# Altium PCB Ground Station PCB1.PcbDoc
Units mm, origin at the board's own origin, x right, y up, seen from the top; angles counter-clockwise.
Board outline 110 x 94.13 mm, 2 copper layers (Top Layer, Bottom Layer), stack 1.57 mm thick; 62 components, 41 nets, 189 pads, 0 vias.
Unrouted connection lines stored in the file: 110.
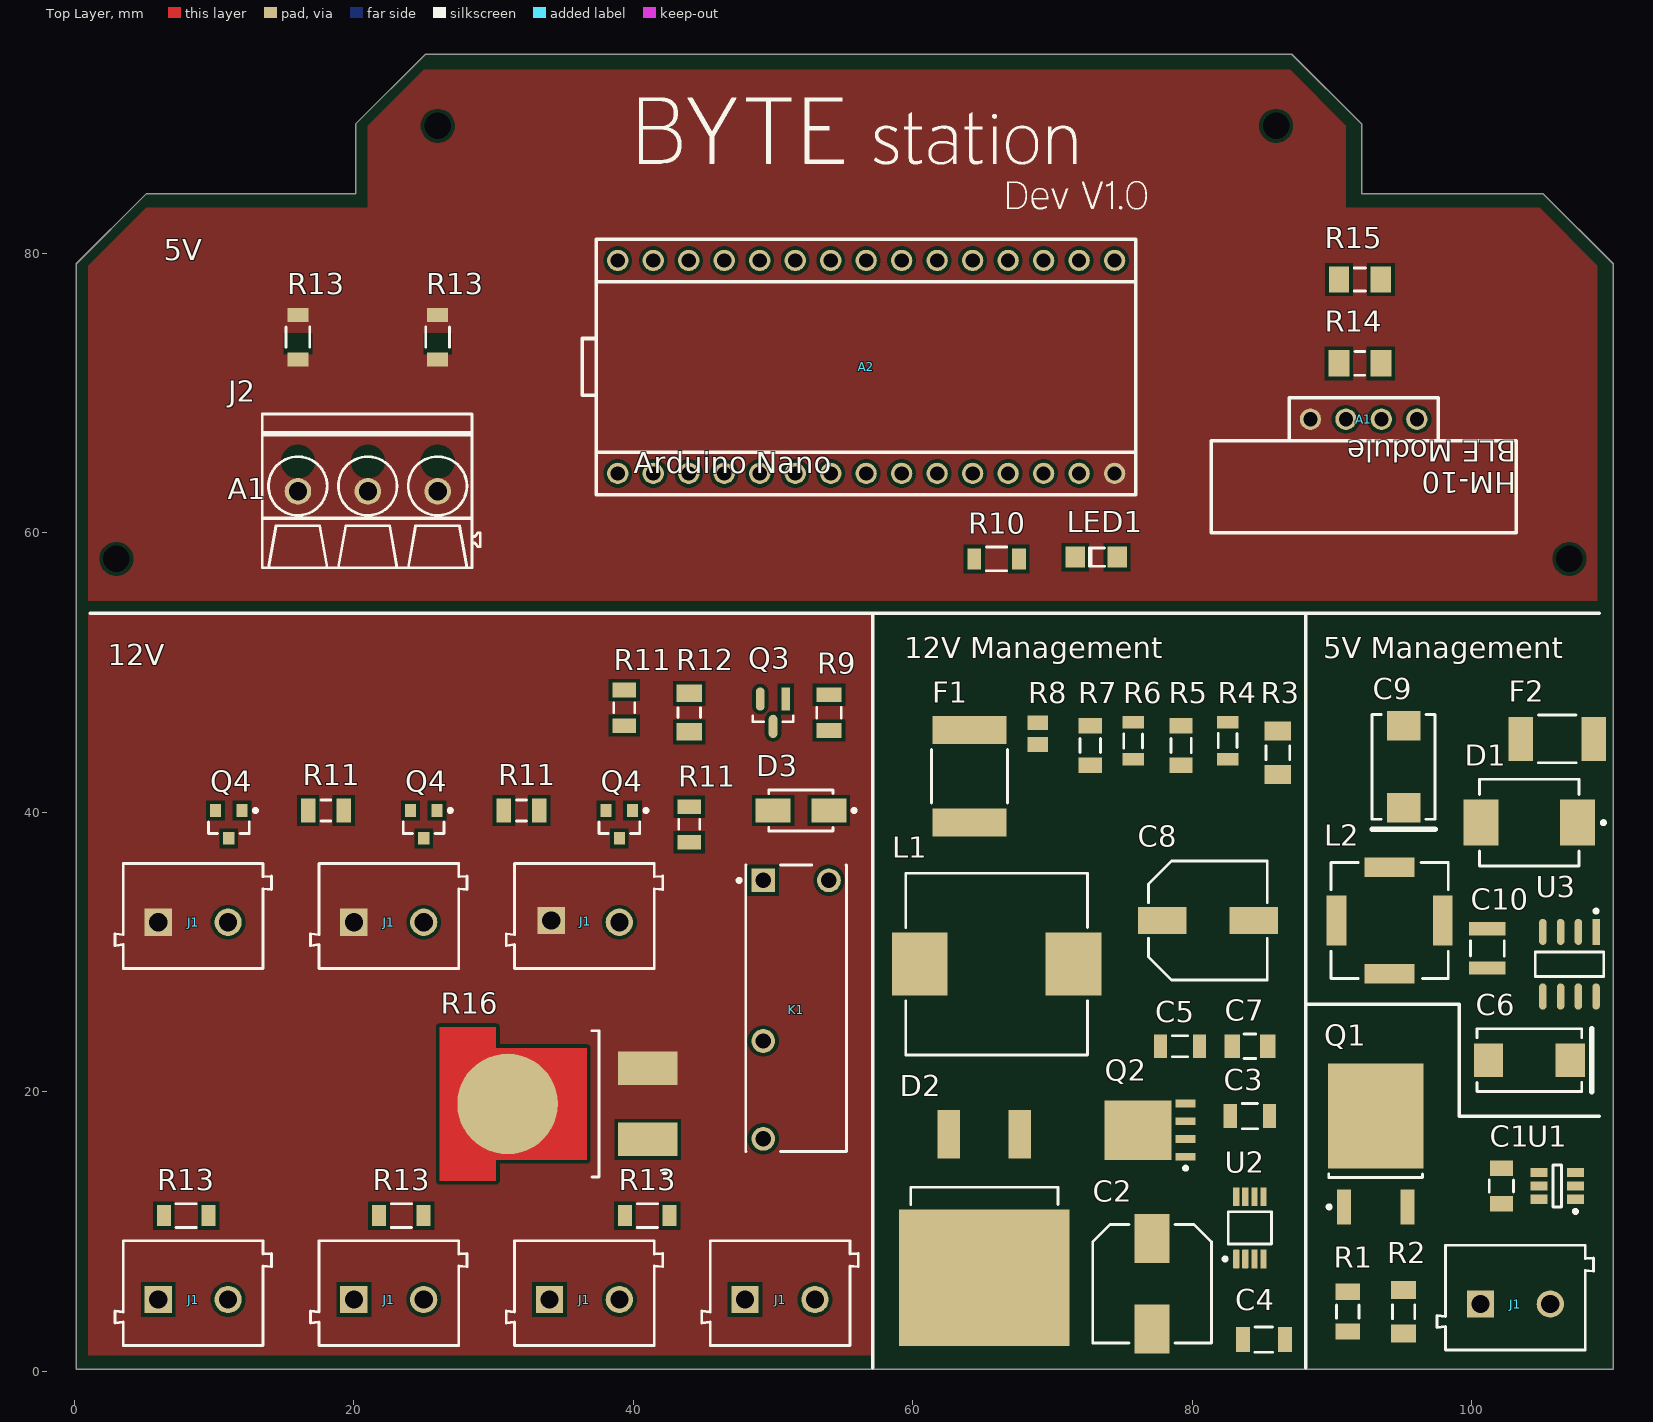
[diagram p0: Top Layer view]
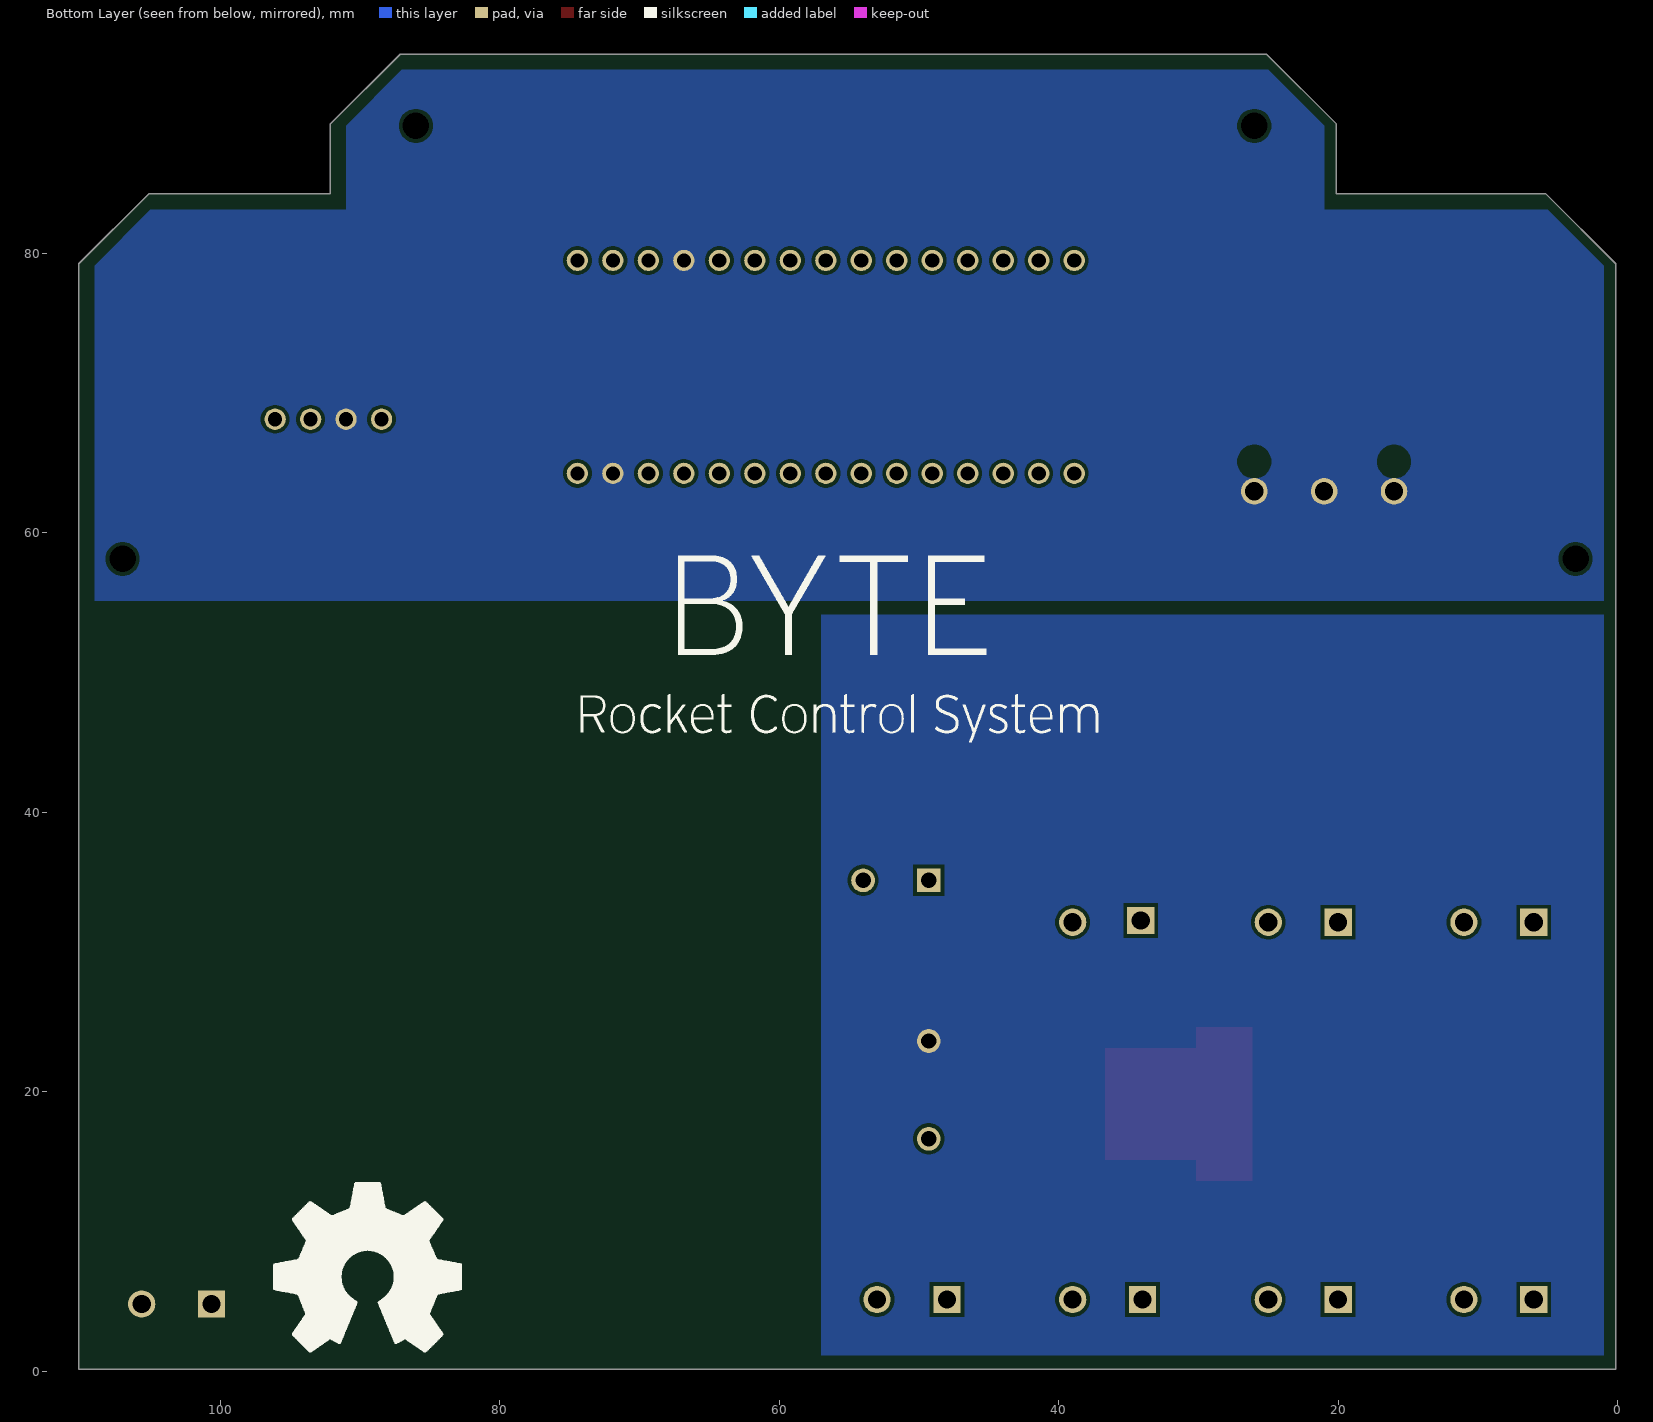
[diagram p1: Bottom Layer view, seen from below]

## Layer stack, top to bottom
Top Solder: solder mask 0.0102, Solder Resist, Dk 3.5
Top Layer: signal copper 0.0356
Dielectric 1: core 1.4986, Core-043, Dk 4.3
Bottom Layer: signal copper 0.0356
Bottom Solder: solder mask 0.0102, Solder Resist, Dk 3.5

## Board outline
0.127,0.127 0.127,79.254 5.127,84.254 20.127,84.254 20.127,89.254 25.127,94.254 87.127,94.254 92.127,89.254 92.127,84.254 105.127,84.254 110.127,79.254 110.127,0.127

## Design rules (kind name [scope] priority, off if disabled: settings)
BoardOutlineClearance [All] p1: gap=0.254 ignorepadtopadclearanceinfootprint=FALSE except(0: Arc-SplitContinuation Track-SplitContinuation SMDPad-SplitContinuation THPad-SplitContinuation Via-SplitContinuation Fill-SplitContinuation Poly-SplitContinuation Region-SplitContinuation Text-SplitContinuation)
Clearance [All] p1: gap=0.254 ignorepadtopadclearanceinfootprint=FALSE except(0: Arc-Hole Track-Hole SMDPad-Hole THPad-Hole Via-Hole Fill-Hole Poly-Hole Region-Hole Text-Hole; 0.127: Arc-Arc Arc-Track Track-Track SMDPad-SMDPad; 0.2: Arc-SMDPad Track-SMDPad; 0.33: Arc-THPad Track-THPad; 0.5: THPad-THPad)
HoleSize [All] p1: absolutevalues=TRUE maxlimit=6.3 minlimit=0.2 maxpercent=80.000 minpercent=20.000
HoleToHoleClearance [All] p1: gap=0.5 allowstackedmicrovias=TRUE
MinimumAnnularRing [All] p1: minimumring=0.13
PlaneConnect [All] p1: planeconnectstyle=Direct reliefexpansion=0.508 reliefentries=4 reliefconductorwidth=0.254 reliefairgap=0.254
PolygonConnect [All] p1: connectstyle=Direct reliefconductorwidth=0.254 reliefentries=4 polygonreliefangle="90 Angle" airgapwidth=0.254
RoomDefinition "Station sheet1" [InComponentClass('Station sheet1')] p1: confinementstyle=ConfineIn formatcopy=TRUE lockcomponents=FALSE outline 111,8 338,8 338,68 111,68
RoomDefinition Power [InComponentClass('Power')] p2: confinementstyle=ConfineIn formatcopy=TRUE lockcomponents=FALSE outline 112,74.55 338,74.55 338,139.55 112,139.55
RoutingPriority RoutingPriority_1 [All] p1: routingpriority=0
RoutingPriority [All] p2: routingpriority=0
RoutingVias [All] p1: holewidth=0.711 width=1.27 viastyle="Through Hole" minholewidth=0.2 minwidth=0.4 maxholewidth=0.711 maxwidth=1.27
SolderMaskExpansion [All] p1: expansion=0.102 istentingtop=FALSE
UnRoutedNet [All] p1: checkbadconnections=TRUE
Width [All] p1: maxlimit=2 minlimit=0.127 preferedwidth=0.254
25 further rules are at their usual default settings.

## Classes and differential pairs
component class "Station sheet1": A1 A2 D3 J1 J2 K1 LED1 Q3 Q4 R9 R10 R11 R12 R13 R14 R15 R16
component class Power: C1 C2 C3 C4 C5 C6 C7 C8 C9 C10 D1 D2 F1 F2 J1 L1 L2 Q1 Q2 R1 R2 R3 R4 R5 R6 R7 R8 U1 U2 U3

## Components (designator, comment, footprint, x,y, rotation, side; value= is the part's Value field where it differs from the comment)
A1 "HM10 SCHEMATIC" HM10 96.08,68.127 r180 top
A2 "ARDUINO NANO" "ARDUINO NANO" 38.887,64.254 r0 top
C1 "CL31B104KBCNFNC" FP-CL31-IPC_C 102.127,13.254 r90 top
C2 "UUD1E221MNL1GS" NIC-CAPA2-8X10_V 77.127,6.254 r270 top
C3 "C1206C104K4RACTU" FP-C1206C-EB-MFG 84.127,18.254 r0 top value="0.10 μF"
C4 "CC1206KRX7R9BB152" FP-CC1206-1_25-MFG 85.127,2.254 r0 top value="1.5 nF"
C5 "CAP 33nF 100V 1206(3216)" CAPC1206(3216)130_L 79.127,23.254 r0 top value=33nF
C6 "TAJE157K020RNJ" AVX-7343-43_L 104.127,22.254 r180 top
C7 "CL31C100DBCNNNC" FP-CL31-IPC_C 84.127,23.254 r0 top
C8 "16SVP180M" PNSC-SVP-E12_L 81.127,32.254 r0 top
C9 "TPSD107K010R0100" AVX-7343-31_L 95.127,43.254 r90 top
C10 "CAP 10nF 50V 1210(3225)" CAPC1210(3225)100_L 101.127,30.254 r270 top value=10nF
D1 "SK33-TP" FP-SMC-MFG 104.127,39.254 r180 top
D2 "STPS20M100SG-TR" FP-STPS20M100SG-TR-MFG 65.127,10.254 r180 top
D3 "S1B-13-F" FP-SMA-MFG 52,40.127 r180 top
F1 "2920L300/15DR" FP-2920L-MFG 64.063,42.576 r270 top value=0.015-0.048Ω
F2 "1812L035/60MR" FP-1812L035-60MR-MFG 106.127,45.254 r0 top value=0.4-1.7Ω
J1 "691102710002" 691102710002#1 103.127,5.254 r0 top
J1 "691102710002" 691102710002#1 50.5,5.577 r0 top
J1 "691102710002" 691102710002#1 8.5,5.577 r0 top
J1 "691102710002" 691102710002#1 36.5,5.577 r0 top
J1 "691102710002" 691102710002#1 22.5,32.577 r0 top
J1 "691102710002" 691102710002#1 8.5,32.577 r0 top
J1 "691102710002" 691102710002#1 22.5,5.577 r0 top
J1 "691102710002" 691102710002#2 36.5,32.577 r0 top
J2 "1934280000" LL_5_00_90_03 21,63 r0 top
K1 "G5NB-1A-E-DC5" FP-G5NB-1A-E-DC5-MFG 51.65,25.977 r270 top
L1 "SRP1250-4R7M" FP-SRP1250-MFG 66,29.127 r180 top
L2 "744071330" "WE-TPC 8043" 94.127,32.254 r180 top
LED1 "150120GS75000" 1206_A 73.127,58.254 r0 top
Q1 "FQD16N25CTM SCHEMATIC" FQD16N25CTM 93.127,16.254 r90 top
Q2 "RJK0651DPB-00#J5" RENE-LFPAK-5_L 76.977,17.254 r180 top
Q3 "MMBT2222A-7-F" FP-SOT23-IPC_A 50,47.127 r270 top
Q4 "BSS138LT1G" ONSC-SOT-23-3-318-08_V 11.05,39.127 r270 top
Q4 "BSS138LT1G" ONSC-SOT-23-3-318-08_V 39,39.127 r270 top
Q4 "BSS138LT1G" ONSC-SOT-23-3-318-08_V 25,39.127 r270 top
R1 "CRCW1206150KFKEB" FP-CRCW1206-e3-IPC_B 91.127,4.254 r270 top
R2 "CRCW1206100RFKEB" RESC3216X60X45ML10T20 95.127,4.254 r270 top
R3 "27K 1% 1206(3216)" RESC1206(3216)_M 86.127,44.254 r90 top value="27000.00 Ohm"
R4 "ERJ-8ENF2551V" RESC3216X70X50LL05T20 82.534,45.127 r90 top
R5 "ERJ-P08J102V" RESC3216X70X50NL05T20 79.206,44.777 r90 top
R6 "ERJ-8ENF8451V" RESC3216X70X50LL05T20 75.775,45.104 r90 top
R7 "ERJ-8ENF1000V" RESC3216X70X50NL05T20 72.702,44.777 r90 top
R8 "WSLP0805R0100FEA" RESC2013X58X38LL25T25 68.939,45.627 r90 top
R9 "CRCW12061K20JNEA" FP-CRCW1206-e3-MFG 54,47.127 r270 top
R10 "AC1206FR-07150RL" FP-AC1206-MFG 66,58.127 r0 top value=150Ω
R11 "CRCW120620K0FKEAHP" RESC3116X65X50LL20T20 18,40.127 r180 top
R11 "CRCW120620K0FKEAHP" RESC3116X65X50LL20T20 32,40.127 r0 top
R11 "CRCW120620K0FKEAHP" RESC3116X65X50LL20T20 39.352,47.477 r90 top
R11 "CRCW120620K0FKEAHP" RESC3116X65X50LL20T20 44,39.127 r270 top
R12 "CRCW120610K0FKEAHP" RESC3116X65X50NL20T20 44,47.127 r270 top
R13 "AC1206FR-074K7L" FP-AC1206-MFG 26,74 r90 top value=4.7KΩ
R13 "AC1206FR-074K7L" FP-AC1206-MFG 41,11.127 r0 top value=4.7KΩ
R13 "AC1206FR-074K7L" FP-AC1206-MFG 16,74 r90 top value=4.7KΩ
R13 "AC1206FR-074K7L" FP-AC1206-MFG 23.4,11.127 r0 top value=4.7KΩ
R13 "AC1206FR-074K7L" FP-AC1206-MFG 8,11.127 r0 top value=4.7KΩ
R14 "ERA8AEB202V" RESC3216X70X50ML20T25 92,72.127 r180 top
R15 "TNPW12061K00BEEN" RESC3216X65X50ML15T25 92,78.127 r180 top
R16 "PWR263S-20-4R70J" FP-PWR263S-20-MFG 34.647,19.127 r90 top value=4.7Ω
U1 "S-1011A70-M6T1U4" S-1011A70-M6T1U4 106.127,13.254 r180 top
U2 "LM3478QMMX/NOPB" DGK0008A_N 84.127,10.254 r90 top
U3 "LM2671MX-5.0/NOPB" FP-D0008A-IPC_C 107,29.127 r270 top

## Footprints (in the part's own frame and the unit in brackets; to place one, negate y for a bottom-side part, rotate by r counter-clockwise, add the part's x,y. Pads: shape width x height; smd on the part's side, far side on the other; paste and mask are expansions set on the pad)
1206_A [mm] "Chip LED, 2-Leads, Body 3.2x1.6mm, IPC Medium Density"
  rect 1.4x1.5 smd: 1(-1.5,0) 2(1.5,0)
  silkscreen extent -0.5,-0.66 0.6,0.65, body extent -1.6,-0.8 1.6,0.8, height 0.68
691102710002#1 [mm] "5,00mm - modular - blue - Horizontal entry with pressure clamp - 9,9 mm height - 02p"
  rect 1.95x1.95 hole 1.3: 1(-2.5,-0.45)
  round 1.95 hole 1.3: 2(2.5,-0.45)
  silkscreen extent -5.6,-3.75 5.6,3.75, body extent -5.6,-3.75 5.6,3.75, height 9.96
691102710002#2 [mm] "5,00mm - modular - blue - Horizontal entry with pressure clamp - 9,9 mm height - 02p"
  rect 1.95x1.95 hole 1.3: 1(-2.373,-0.323)
  round 1.95 hole 1.3: 2(2.5,-0.45)
  silkscreen extent -5.6,-3.75 5.6,3.75, body extent -5.6,-3.75 5.6,3.75, height 9.96
"ARDUINO NANO" [mil]
  round 60 hole 40: 1(1400,600) 2(1300,600) 3(1200,600) 4(1100,600) 5(1000,600) 6(900,600) 7(800,600) 8(700,600) 9(600,600) 10(500,600) 11(400,600) 12(300,600) 13(200,600) 14(100,600) 15(0,600) 16(0,0) 17(100,0) 18(200,0) 19(300,0) 20(400,0) 21(500,0) 22(600,0) 23(700,0) 24(800,0) 25(900,0) 26(1000,0) 27(1100,0) 28(1200,0) 29(1300,0) 30(1400,0)
  silkscreen extent -100,-60 1460,660
AVX-7343-31_L [mm] "Molded Capacitor, 2-Leads, Body 7.5x4.5mm, IPC High Density"
  rect 2.1x2.4 smd: 1(-2.925,0) 2(2.925,0)
  silkscreen extent -4.47,-2.25 3.75,2.25, body extent -3.97,-2.25 3.97,2.25, height 3.1
AVX-7343-43_L [mm] "Molded Capacitor, 2-Leads, Body 7.5x4.5mm, IPC High Density"
  rect 2.1x2.4 smd: 1(-2.925,0) 2(2.925,0)
  silkscreen extent -4.47,-2.25 3.75,2.25, body extent -3.97,-2.25 3.97,2.25, height 4.3
CAPC1206(3216)130_L [mm] "Chip Capacitor, Body 3.2x1.6mm, Height 1.3mm, IPC High Density"
  rect 0.95x1.7 smd: 1(-1.4,0) 2(1.4,0)
  silkscreen extent -0.55,-0.75 0.55,0.75, body extent -1.7,-0.9 1.7,0.9, height 1.3
CAPC1210(3225)100_L [mm] "Chip Capacitor, Body 3.2x2.5mm, Height 1mm, IPC High Density"
  rect 0.95x2.6 smd: 1(-1.4,0) 2(1.4,0)
  silkscreen extent -0.55,-1.2 0.55,1.2, body extent -1.7,-1.35 1.7,1.35, height 1
DGK0008A_N [mm] "TSOP, 8-Leads, Body 3.1x3.1mm, Pitch 0.65mm, IPC Medium Density"
  rrect22% 1.35x0.45 smd: 1(-2.225,0.975) 2(-2.225,0.325) 3(-2.225,-0.325) 4(-2.225,-0.975) 5(2.225,-0.975) 6(2.225,-0.325) 7(2.225,0.325) 8(2.225,0.975)
  silkscreen extent -2.35,-1.55 1.15,1.9, body extent -2.45,-1.5 2.45,1.5, height 0.94
FP-1812L035-60MR-MFG [mm]
  rect 1.78x3.15 smd paste+0 mask+0: 1(-2.615,0) 2(2.615,0)
  silkscreen extent -1.35,-1.71 1.35,1.71, body extent -3.6,-1.81 3.6,1.81, height 0.25
FP-2920L-MFG [mm]
  rect 2x5.3 smd paste+0 mask+0: 1(-3.3,0) 2(3.3,0)
  silkscreen extent -1.92,-2.72 1.92,2.72, body extent -4.4,-2.82 4.4,2.82, height 0.25
FP-AC1206-MFG [mm]
  rect 1x1.5 smd paste+0 mask+0: 1(-1.6,0) 2(1.6,0)
  silkscreen extent -0.72,-0.85 0.72,0.85, body extent -2.2,-0.95 2.2,0.95, height 0.25
FP-C1206C-EB-MFG [mm]
  rect 0.95x1.7 smd paste+0 mask+0: 1(-1.4,0) 2(1.4,0)
  silkscreen extent -0.55,-0.9 0.55,0.9, body extent -2,-1 2,1, height 0.25
FP-CC1206-1_25-MFG [mm]
  rect 1x1.8 smd paste+0 mask+0: 1(-1.5,0) 2(1.5,0)
  silkscreen extent -0.63,-0.9 0.63,0.9, body extent -2.2,-1.25 2.2,1.25, height 0.25
FP-CL31-IPC_C [mm]
  rect 1.105x1.658 smd paste+0 mask+0: 1(-1.276,0) 2(1.276,0)
  silkscreen extent -0.42,-0.87 0.42,0.87, body extent -1.93,-0.97 1.93,0.97, height 0.25
FP-CRCW1206-e3-IPC_B [mm]
  rect 1.156x1.758 smd paste+0 mask+0: 1(-1.426,0) 2(1.426,0)
  silkscreen extent -0.47,-0.8 0.47,0.8, body extent -2.25,-1.13 2.25,1.13, height 0.25
FP-CRCW1206-e3-MFG [mm]
  rect 1.05x1.8 smd paste+0 mask+0: 1(-1.275,0) 2(1.275,0)
  silkscreen extent -0.38,-0.87 0.38,0.87, body extent -1.9,-1 1.9,1, height 0.25
FP-D0008A-IPC_C [mm]
  rect 1.869x0.542 smd paste+0 mask+0: 1(-2.314,1.905)
  rrect100% 1.869x0.542 smd paste+0 mask+0: 2(-2.314,0.635) 3(-2.314,-0.635) 4(-2.314,-1.905) 5(2.314,-1.905) 6(2.314,-0.635) 7(2.314,0.635) 8(2.314,1.905)
  silkscreen extent -3.92,-2.45 0.88,2.45, body extent -3.35,-2.55 3.35,2.55, height 0.25
FP-G5NB-1A-E-DC5-MFG [mm]
  rect 1.7x1.7 hole 1.1 paste-1000 mask+0: 1(-9.15,-2.35)
  round 1.7 hole 1.1 paste-1000 mask+0: 2(2.35,-2.35) 3(9.35,-2.35) 4(-9.15,2.35)
  silkscreen extent -10.25,-4.2 10.25,3.6, body extent -10.35,-3.7 10.35,3.7, height 0.25
FP-PWR263S-20-MFG [mm]
  rect 2.4x4.23 smd paste+0 mask+0: 1(-2.54,-6.385) 2(2.54,-6.385)
  round 7.2 smd paste+0 mask+0: 3(0,3.647)
  Top Layer region: -5.5,8.5 5.5,8.5 5.5,4.48 4,4.48 4,-2.02 -4,-2.02 -4,4.48 -5.5,4.48 -5.5,8.5
  silkscreen extent -5.24,-7.73 5.24,-2.4, body extent -5.6,-8.6 5.6,8.6, height 0.25
FP-SMA-MFG [mm]
  rect 2.5x1.7 smd paste+0 mask+0: 1(-2,0) 2(2,0)
  silkscreen extent -3.93,-1.46 2.3,1.46, body extent -3.35,-1.56 3.35,1.56, height 0.25
FP-SMC-MFG [mm]
  rect 2.5x3.3 smd paste+0 mask+0: 1(-3.45,0) 2(3.45,0)
  silkscreen extent -5.43,-3.11 3.55,3.11, body extent -4.8,-3.21 4.8,3.21, height 0.25
FP-SOT23-IPC_A [mm]
  rect 1.659x0.627 smd paste+0 mask+0: 1(-0.977,0.915)
  rrect100% 1.659x0.627 smd paste+0 mask+0: 2(-0.977,-0.915) 3(0.977,0)
  silkscreen extent 0.23,-1.45 0.65,1.45, body extent -2.31,-1.95 2.31,1.95, height 0.25
FP-SRP1250-MFG [mm]
  rect 4x4.5 smd paste+0 mask+0: 1(-5.5,0) 2(5.5,0)
  silkscreen extent -6.5,-6.5 6.5,6.5, body extent -7.6,-6.75 7.6,6.75, height 0.25
FP-STPS20M100SG-TR-MFG [mm]
  rect 1.6x3.5 smd paste+0 mask+0: 1(-2.54,-6.7) 3(2.54,-6.7)
  rect 12.2x9.75 smd paste+0 mask+0: 4(0,3.575)
  silkscreen extent -5.28,-2.91 5.28,-1.68, body extent -6.2,-8.55 6.2,8.55, height 0.25
FQD16N25CTM [mm] "D-PAK, 3-Pads, Body 6.21x6.72mm (max), IPC Low Density"
  rect 2.5x1 smd: 1(-4.5,2.28) 2(-4.5,-2.28)
  rect 7.5x6.85 smd: 3(2,0)
  silkscreen extent -4.62,-3.35 -2.15,3.45, body extent -2.4,-3.35 3.82,3.35, height 2.39
HM10 [mil]
  round 60 hole 40: 1(0,0) 2(100,0) 3(200,0) 4(300,0)
  silkscreen extent -280,-60 580,320
LL_5_00_90_03 [mm] "OMNIMATE Signal - Serie LL  LL 5.00/03/90 3.2"
  round 1.9 hole 1.3: A1(-5,-0.03) A2(0,-0.03) A3(5,-0.03)
  silkscreen extent -7.55,-5.5 8.05,5.5, body extent -7.55,-5.5 8.05,5.5, height 17.11
NIC-CAPA2-8X10_V [mm] "Aluminum Electrolytic Capacitor, Diameter 8mm, Height 10.8mm, Pitch 6.5mm"
  rect 3.5x2.5 smd: 1(-3.25,0) 2(3.25,0)
  silkscreen extent -4.25,-4.25 4.25,4.25, body extent -3.99,-3.97 3.99,4, height 10.8
ONSC-SOT-23-3-318-08_V [mm] "SOT23, 3-Leads, Body 2.92x1.3mm, Pitch 0.95mm"
  rect 0.9x0.8 smd: 1(-1,0.95) 2(-1,-0.95) 3(1,0)
  silkscreen extent -1.12,-1.46 0.65,2.03, body extent -0.65,-1.46 0.65,1.46, height 1.11
PNSC-SVP-E12_L [mm] "Aluminum Electrolytic Capacitor, Body 8.30x8.30x12.00mm, IPC High Density"
  rect 3.45x1.95 smd: 1(-3.275,0) 2(3.275,0)
  silkscreen extent -4.25,-4.25 4.25,4.25, body extent -4.5,-4.25 4.5,4.25, height 12
RENE-LFPAK-5_L [mm] "DPAK, 5-Leads, Body 5.3x3.95mm, Pitch 1.27mm, IPC High Density"
  rect 1.45x0.55 smd: 1(-2.55,1.905) 2(-2.55,0.635) 3(-2.55,-0.635) 4(-2.55,-1.905)
  rect 4.8x4.25 smd: 5(0.85,0)
  silkscreen extent -2.68,2.61 -2.43,2.85, body extent -2.5,-2.65 3.5,2.65, height 1.13
RESC1206(3216)_M [mm] "Chip Resistor, Body 3.2x1.6mm, IPC Low Density"
  rect 1.35x1.9 smd: 1(-1.55,0) 2(1.55,0)
  silkscreen extent -0.5,-0.85 0.5,0.85, body extent -1.67,-0.87 1.67,0.87, height 0.75
RESC2013X58X38LL25T25 [mm] "Chip Resistor, 2-Leads, Body 2.03x1.27mm, IPC High Density"
  rect 1.05x1.45 smd: 1(-0.775,0) 2(0.775,0)
  body extent -1.14,-0.76 1.14,0.76, height 0.59
RESC3116X65X50LL20T20 [mm] "Chip Resistor, 2-Leads, Body 3.10x1.60mm, IPC High Density"
  rect 1.05x1.7 smd: 1(-1.275,0) 2(1.275,0)
  silkscreen extent -0.35,-0.75 0.35,0.75, body extent -1.65,-0.9 1.65,0.9, height 0.65
RESC3116X65X50NL20T20 [mm] "Chip Resistor, 2-Leads, Body 3.10x1.60mm, IPC Medium Density"
  rect 1.25x1.8 smd: 1(-1.375,0) 2(1.375,0)
  silkscreen extent -0.35,-0.8 0.35,0.8, body extent -1.65,-0.9 1.65,0.9, height 0.65
RESC3216X60X45ML10T20 [mm] "Chip Resistor, 2-Leads, Body 3.20x1.60mm, IPC Low Density"
  rect 1.3x1.8 smd: 1(-1.55,0) 2(1.55,0)
  silkscreen extent -0.5,-0.8 0.5,0.8, body extent -1.65,-0.85 1.65,0.85, height 0.6
RESC3216X65X50ML15T25 [mm] "Chip Resistor, 2-Leads, Body 3.20x1.60mm, IPC Low Density"
  rect 1.45x1.85 smd: 1(-1.5,0) 2(1.5,0)
  silkscreen extent -0.4,-0.82 0.4,0.82, body extent -1.68,-0.87 1.68,0.87, height 0.65
RESC3216X70X50LL05T20 [mm] "Chip Resistor, 2-Leads, Body 3.20x1.60mm, IPC High Density"
  rect 0.9x1.55 smd: 1(-1.325,0) 2(1.325,0)
  silkscreen extent -0.5,-0.67 0.5,0.67, body extent -1.63,-0.82 1.62,0.82, height 0.7
RESC3216X70X50ML20T25 [mm] "Chip Resistor, 2-Leads, Body 3.20x1.60mm, IPC Low Density"
  rect 1.5x1.9 smd: 1(-1.5,0) 2(1.5,0)
  silkscreen extent -0.35,-0.85 0.35,0.85, body extent -1.7,-0.9 1.7,0.9, height 0.7
RESC3216X70X50NL05T20 [mm] "Chip Resistor, 2-Leads, Body 3.20x1.60mm, IPC Medium Density"
  rect 1.1x1.65 smd: 1(-1.425,0) 2(1.425,0)
  silkscreen extent -0.5,-0.72 0.5,0.72, body extent -1.63,-0.82 1.62,0.82, height 0.7
S-1011A70-M6T1U4 [mm] "SOT23, 6-Leads, Body 2.90x2.45mm, Pitch 0.95mm, IPC Low Density"
  rect 1.2x0.65 smd: 1(-1.3,0.95) 2(-1.3,0) 3(-1.3,-0.95) 4(1.3,-0.95) 5(1.3,0) 6(1.3,0.95)
  silkscreen extent -1.43,-1.5 0.3,1.95, body extent -0.7,-1.5 0.7,1.5, height 1.1
"WE-TPC 8043" [mm] "SMD Inductor, 2-Leads, Body 8,0x8,0mm"
  rect 1.4x3.6 smd: 1(-3.8,0) 2(3.8,0)
  rect 3.6x1.4 smd: 3(0,3.8) 4(0,-3.8)
  silkscreen extent -4.2,-4.15 4.2,4.15, body extent -4,-4 4,4, height 4.28

## Part data
C1: library part CMP-13271-001276-1, "Cap Ceramic 100nF 50V X7R ±10% SMD 1206 +125°C Embossed T/R", Capacitance=100nF, Case Code (Imperial)=1206, Case Code (Metric)=3216, Dielectric=X7R, Max Operating Temperature=125°C, Min Operating Temperature=-55°C, Package Quantity=1, Tolerance=10%, Voltage Rating=50V, Case/Package=1206, Depth=1.6mm, Height=0.85mm, Length=0.126inch, Mount="Surface Mount", Packaging="Tape and Reel", Radiation Hardening=No, Thickness=0.037inch, Width=0.063inch
C2: library part CMP-0687-00079-1, "Aluminum Electrolytic Capacitor, UD Series, Low Impedance, 220 uF, 25 V, + / - 20%, -55 to 105 degC, Chip Type, 8 x 10 mm D x L, Pb-Free, Reel", Manufacturer=Nichicon, Rated Capacitance="220 uF", Rated Ripple Current (at 100kHz)="450 mA", Rated Voltage="25 V", Tolerance Rated Capacitance="-20 to 20%", ComponentLink1Description="Manufacturer URL", ComponentLink1URL=http://www.nichicon.co.jp/, ComponentLink2Description=Datasheet, ComponentLink2URL=http://products.nichicon.co.jp/en/pdf/XJA043/e-ud.pdf, ComponentLink3Description="Package Specification", ComponentLink3URL=http://products.nichicon.co.jp/en/pdf/XJA043/e-ud.pdf, DatasheetVersion=08/2012, Diameter="8 mm", Endurance Time="5000 h", Impedance="0.17 Ohm", Length="10 mm", Mounting Technology="Surface Mount", PackageDescription="2-Pin Surface Mount Device, Diameter 8 mm, Height 10 mm, Pitch 6.5 mm", PackageReference=CAPAE-D8H10, Packing="Dia382mm Reel", PartNumber=UUD1E221MNL1GS, RoHS=TRUE
C3: library part CMP-03020-021070-1, "CAP CER 0.1UF 16V 10% X7R 1206", Capacitance="0.10 μF", Manufacturer=KEMET, Package=C1206C-EB, Temperature="-55°C to +150°C", Temperature Characteristic=X7R, Temperature Coefficient=15%, Temperature Range High=+150°C, Temperature Range Low=-55°C, Tolerance=0.1, Voltage Rating="16 V", Automotive=Yes, Automotive Grade="Grade 0", Category=Cap, ComponentLink2Description=Datasheet, ComponentLink2URL=https://content.kemet.com/datasheets/KEM_C1007_X8R_ULTRA_150C_SMD.pdf, Device Class L1="Passive Components", Device Class L2=Capacitors, Device Class L3="Ceramic Capacitors", Digikey Description="CAP CER 0.1UF 16V 10% X7R 1206", Height=0.88mm, Ipc Land Pattern Name=CAPC320160X78, Lead Free=Yes, Manufacturer Part Number=C1206C104K4RACTU, Material=Ceramic, Mouser Description="Multilayer Ceramic Capacitors MLCC - SMD/SMT 16volts 0.1uF X7R 10%", Octopart=https://octopart.com/c1206c104k4ractu-kemet-12577600, RoHS=TRUE
C4: library part CMP-03422-000879-1, "Surface Mount Ceramic Multilayer Capacitor 0.0015uF 10% X7R 50V 1206 Paper T/R", Capacitance="1.5 nF", Manufacturer=Yageo, Package=CC1206-1.25, Temperature="-55°C to +125°C", Temperature Characteristic=X7R, Temperature Coefficient=15%, Temperature Range High=+125°C, Temperature Range Low=-55°C, Tolerance=0.1, Voltage Rating="50 V", Automotive=No, Automotive Grade=NA, Category=Cap, ComponentLink2Description=Datasheet, ComponentLink2URL=http://www.yageo.com/documents/recent/UPY-NP0X7R_HV_1KV-to-3KV_11.pdf, Device Class L1="Passive Components", Device Class L2=Capacitors, Device Class L3="Ceramic Capacitors", Digikey Description="Surface Mount Ceramic Multilayer Capacitor 0.0015uF 10% X7R 50V 1206 Paper T/R", Footprint Url=http://www.yageo.com/exep/pages/download/literatures/UPY-C_GEN_24.pdf, Height=1.45mm, Lead Free=Yes, Manufacturer Part Number=CC1206KRX7R9BB152, Material=Ceramic, Mouser Description="1206 1.5 nF 50 V ±10 % Tolerance X7R SMT Multilayer Ceramic Capacitor", Octopart=https://octopart.com/cc1206krx7r9bb152-yageo-193052, RoHS=TRUE
C5: library part CMP-1037-03892-1, "CAP 33nF 100V ±10% 1206 (3216 Metric) Thickness 1.3mm SMD", Case-EIA=1206, Case-Metric=3216, Rated Voltage="100 V", Tolerance=Â±10%, Max Thickness="1.3 mm", Technology=SMT
C6: library part CMP-2000-07229-1, "Standard Tantalum Capacitor, 150 uF, +/- 10%, 20 V, -55 to 125 degC, 2-Pin SMD, RoHS, Tape and Reel", Capacitance=150µF, ESR (Equivalent Series Resistance)=300mOhm, Lifetime @ Temp.=-, Manufacturer=AVX, Manufacturer Size Code=E, Operating Temperature=-55°C~125°C, Package / Case=2917(7343Metric), Package Description="2-Pin Surface Mount Device, Body 7.3 x 4.35 mm", Package Reference=7343-43, PCN Part Number=TAJSeriesSuffix08/Dec/2008, Standard Package=1, Tolerance=±10%, Voltage - Rated=20V, Catalog Drawings=TAJSeriesSideTAJSeries, Category=Capacitors, Datasheet URL=http://datasheets.avx.com/TAJ.pdf, Datasheet Version=02/2016, EDA / CAD Models=DownloadfromAcceleratedDesigns, Family=TantalumCapacitors, Features=GeneralPurpose, Height - Seated (Max)="0.169\"(4.30mm)", Lead Spacing=-, Manufacturer URL=http://www.avx.com/, Mounting Technology=SurfaceMount, Mounting Type=SurfaceMount, Online Catalog=TAJSeries, Other Names=478-2360-1, Packaging=CutTape(CT), Product Training Modules=ComponentSolutionsforSmartMeterApplications, Series=TAJ, Size / Dimension="0.287\"Lx0.169\"W(7.30mmx4.30mm)", Type=Molded
C7: library part CMP-13271-002400-1, "Cap Ceramic 10pF 50V C0G ±0.5pF SMD 1206 +125°C Embossed T/R", Capacitance=10pF, Case Code (Imperial)=1206, Case Code (Metric)=3216, Dielectric=C0G, Max Operating Temperature=125°C, Min Operating Temperature=-55°C, Package Quantity=1, Voltage Rating=50V, Case/Package=1206, Depth=1.6mm, Height=0.85mm, Lead Free="Lead Free", Length=3.2mm, Mount="Surface Mount", Packaging="Tape and Reel", Radiation Hardening=No, Thickness=0.039inch, Voltage Rating (DC)=50V, Width=0.063inch
C8: library part CMP-2000-05492-1, "Conductive Polymer Aluminum Solid Capacitor, 180 uF, +/- 20%, 16 V, -55 to 105 degC, 2-Pin SMD (E12), RoHS, Tape and Reel", Capacitance=180µF, Capacitance Tolerance=±20%, Capacitor Case Style=RadialCan-SMD, Life Time @ Temperature=2000hours@105°C, Manufacturer=Panasonic, Operating Temperature Max=105°C, Operating Temperature Min=-55°C, Package Description="2-Pin Surface Mount Device, Body 8.3 x 8.3 mm", Package Reference=SVP-E12, Ripple Current AC=3.64A, Voltage Rating=16V, Datasheet URL=https://industrial.panasonic.com/cdbs/www-data/pdf/AAB8000/AAB8000C193.pdf, Datasheet Version=11/2015, Diameter=8mm, ESR=0.02ohm, Height=11.9mm, Manufacturer URL=http://www.panasonic.com/, Mounting Technology=SurfaceMount, Packaging=CutTape, Product Range=PANASONIC-SVPSeries, SVHC=ToBeAdvised
C9: library part CMP-2000-07298-1, "Tantalum Capacitor, 100 uF, +/- 10%, 10 V, -55 to 125 degC, 2917 (7343 Metric), RoHS, Tape and Reel", Capacitance=100µF, ESR (Equivalent Series Resistance)=100mOhm, Lifetime @ Temp.=-, Manufacturer=AVX, Manufacturer Size Code=D, Operating Temperature=-55°C~125°C, Package / Case=2917(7343Metric), Package Description="2-Pin Surface Mount Device, Body 7.3 x 4.35 mm", Package Reference=7343-31, Standard Package=1, Tolerance=±10%, Voltage - Rated=10V, Catalog Drawings=TPSSeriesSides, Category=Capacitors, Datasheet URL=http://datasheets.avx.com/TPS.pdf, Datasheet Version=01/2017, Family=TantalumCapacitors, Featured Product=TPSCapacitors, Features=GeneralPurpose, Height - Seated (Max)="0.122\"(3.10mm)", Lead Spacing=-, Manufacturer URL=http://www.avx.com/, Mounting Technology=SurfaceMount, Mounting Type=SurfaceMount, Online Catalog=TPSSeries, Other Names=478-1777-1, Packaging=CutTape(CT), Product Training Modules=ComponentSolutionsforSmartMeterApplications, Series=TPS, Size / Dimension="0.287\"Lx0.169\"W(7.30mmx4.30mm)", Type=Molded
C10: library part CMP-1038-01120-1, "CAP 10nF 50V ±5% 1210 (3225 Metric) Thickness 1mm SMD", Case-EIA=1210, Case-Metric=3225, Rated Voltage="50 V", Tolerance=Â±5%, Max Thickness="1 mm", Technology=SMT
D1: library part CMP-56206-000007-1, "DIODE SCHOTTKY 30V 3A DO214AB", Average Rectified Current=3A, Capacitance=250pF, Case/Package=SMC, Forward Voltage=500mV, Max Forward Surge Current (Ifsm)=100A, Max Operating Temperature=150°C, Max Repetitive Reverse Voltage (Vrrm)=30V, Max Reverse Leakage Current=500uA, Min Operating Temperature=-55°C, Package Quantity=1, Current Rating=3A, Element Configuration=Single, Forward Current=3A, Height=2.417mm, Lead Free="Lead Free", Length=7.11mm, Max Reverse Voltage (DC)=30V, Max Surge Current=100A, Mount="Surface Mount", Number of Pins=2, Output Current=3A, Packaging="Tape and Reel", Peak Non-Repetitive Surge Current=100A, Peak Reverse Current=500uA, Polarity=Standard, Radiation Hardening=No, Voltage Rating (DC)=30V, Width=6.22mm
D2: library part CMP-12187-000010-1, "DIODE SCHOTTKY 100V 20A D2PAK", Forward Current=20A, Manufacturer=STMicroelectronics, Max Junction Temp=+150°C, Max Repetitive Reverse Voltage=100V, Max Surge Forward Current=350A, Peak Reverse Current=10uA, Temperature="to +150°C", Automotive=No, Category=Diode, ComponentLink2Description=Datasheet, ComponentLink2URL=https://www.st.com/resource/en/datasheet/stps20m100s.pdf, Device Class L1="Discrete Semiconductors", Device Class L2=Diodes, Device Class L3="Schottky Diodes", Digikey Description="DIODE SCHOTTKY 100V 20A D2PAK", Height=4.85mm, Lead Free=Yes, Manufacturer Part Number=STPS20M100SG-TR, Mouser Description="Schottky Diodes & Rectifiers 20A 100V", Octopart=https://octopart.com/stps20m100sg-tr-stmicroelectronics-17669033, Package=STPS20M100SG-TR, RoHS=TRUE, Standoff Height=0mm, Temperature Range High=+150°C
D3: library part CMP-12791-000051-1, "DIODE GEN PURP 100V 1A SMA", Average Rectified Current=1A, Capacitance=10pF, Case/Package=SMA, Forward Voltage=1.1V, Max Operating Temperature=150°C, Max Repetitive Reverse Voltage (Vrrm)=100V, Max Surge Current=30A, Min Operating Temperature=-65°C, Package Quantity=5000, Peak Reverse Current=5uA, Contact Plating=Tin, Current Rating=1A, Element Configuration=Single, Forward Current=1A, Height=2.1mm, Lead Free="Lead Free", Length=4.6mm, Max Reverse Voltage (DC)=100V, Mount="Surface Mount", Number of Pins=2, Output Current=1A, Packaging="Tape and Reel", Peak Non-Repetitive Surge Current=30A, Polarity=Standard, Radiation Hardening=No, Recovery Time=1.8us, Reverse Recovery Time=3us, Reverse Voltage (DC)=100V, Termination=SMD/SMT, Voltage Rating (DC)=100V, Weight=0.002258oz, Width=2.92mm
F1: library part CMP-2000-05550-2, "PTC RESET FUSE 15V 3A 2920", Ambient Temperature Range High=+85°C, Ambient Temperature Range Low=-40°C, Current Rating=40A, Hold Current=3A, Manufacturer=Littelfuse, Package=2920L, Resistance=0.015-0.048Ω, Temperature="-40°C to +85°C", Trip Current=5A, Voltage Rating=15V, Automotive=No, Category=Fuse, ComponentLink2Description=Datasheet, ComponentLink2URL=https://m.littelfuse.com/~/media/electronics/datasheets/resettable_ptcs/littelfuse_ptc_2920l_datasheet.pdf.pdf, Device Class L1="Circuit Protection", Device Class L2="PTC Resettable Fuses", Device Class L3=unset, Digikey Description="PTC RESET FUSE 15V 3A 2920", Height=1.25mm, Lead Free=Yes, Manufacturer Part Number=2920L300/15DR, Octopart=https://octopart.com/2920l300%2F15dr-littelfuse-673797, RoHS=TRUE, Temperature Range High=+85°C, Temperature Range Low=-40°C, Trip Time=20s
F2: library part CMP-08606-000011-1, "PTC RESET FUSE 60V 350MA 1812", Ambient Temperature Range High=+85°C, Ambient Temperature Range Low=-40°C, Current Rating=10A, Hold Current=0.35A, Manufacturer=Littelfuse, Package=0, Resistance=0.4-1.7Ω, Temperature="-40°C to +85°C", Trip Current=0.7A, Voltage Rating=60V, Automotive=No, Category=Fuse, ComponentLink2Description=Datasheet, ComponentLink2URL=https://www.littelfuse.com/~/media/electronics/datasheets/resettable_ptcs/littelfuse_ptc_1812l_datasheet.pdf.pdf, Device Class L1="Circuit Protection", Device Class L2="PTC Resettable Fuses", Device Class L3=unset, Digikey Description="PTC RESET FUSE 60V 350MA 1812", Height=1.8mm, Lead Free=Yes, Manufacturer Part Number=1812L035/60MR, Octopart=https://octopart.com/1812l035%2F60mr-littelfuse-75250819, RoHS=TRUE, Temperature Range High=+85°C, Temperature Range Low=-40°C, Trip Time=0.15s
J1 J1 J1 J1 J1 J1 J1 J1: library part CMP-1502-03258-1, "Series 102 - 5.00 mm Horizontal Entry Modular with Pressure Clamp WR-TBL, 2 pin", Manufacturer="Wurth Elektronik", Operating Temperature=-40to105degC, Datasheet URL=http://katalog.we-online.de/em/datasheet/6911027100xx.pdf, Manufacturer URL=http://www.we-online.de, Mounting Technology=THT, Package Reference=691102710002, Packaging=Box, Part Number=691102710002, Pin Number=2, Pitch=5.00mm, Publisher=WurthElektronik
J2: library part CMP-1559-01665-1, "OMNIMATE Signal - series LL", Colour=Orange, Manufacturer=Weidmueller, Rated_current_use_group_B_UL_1059="20 A", Rated_voltage_for_surge_voltage_class_pollution_degree_II_2="500 V", Rated_voltage_use_group_B_UL_1059="300 V", UL_94_flammability_rating=V-0, ComponentLink1Description="Manufacturer URL", ComponentLink1URL=http://www.weidmueller.com/, ComponentLink2Description="URL Link1", ComponentLink2URL=http://catalog.weidmueller.com/catalog/Start.do?localeId=en&ObjectID=1934280000, Contact_material=Cu-Leg, Contact_surface=tinned, Insulating_material="Wemid (PA)", Mounting_onto_the_PCB="Solder connection", No_of_poles=3, PackageReference=LL_5_00_90_03, Packaging=Box, PartNumber=1934280000, Pitch_inch="0,197 inch", Pitch_mm="5 mm", Qty="100 PCS", Revision=V1, Short_text_for_material="LL 5.00/03/90 3.2SN OR BX", Side_termination_characteristic="closed side", Solder_pin_length_mm="3,2 mm", Solid_max_H05_07_V_U="6 mm²", Solid_min_H05_07_V_U="0,5 mm²", Wire_cross_section_AWG_max_UL_1059="AWG 12", Wire_cross_section_AWG_min_UL_1059="AWG 28"
K1: library part CMP-08822-000168-1, "RELAY GENERAL PURPOSE SPST 5A 5V", Coil Current=40mA, Coil Power=200mW, Coil Resistance=125R, Coil Voltage (DC)=5V, Contact Current Rating=5A, Max Operating Temperature=70°C, Max Voltage Rating (AC)=250V, Max Voltage Rating (DC)=30V, Min Operating Temperature=-40°C, Package Quantity=100, Coil Type=Non-Latching, Mount="Through Hole", Number of Pins=4, Operate Time=10ms, Packaging=Bulk, Relay Type="General Purpose", Release Time=10ms, Termination="PC Pin", Throw Configuration=SPST, Weight=4g
L1: library part CMP-07248-000044-1, "FIXED IND 4.7UH 12A 15 MOHM SMD", Case/Package=Nonstandard, Current Rating=12A, DC Resistance (DCR)=15mR, Inductance=4.7uH, Inductance Tolerance=20%, Max Operating Temperature=150°C, Min Operating Temperature=-55°C, Package Quantity=500, Saturation Current=27A, Test Frequency=100kHz, Composition=Wirewound, Core Material=Ferrite, DC Current=12A, Depth=13.5mm, Height=5.2mm, Height - Seated (Max)=0.205inch, Length=13.9mm, Material=Ferrite, Max DC Current=12A, Military Standard=Not, Mount="Surface Mount", Number of Pins=2, Packaging="Tape and Reel", Radiation Hardening=No, REACH SVHC="No SVHC", RMS Current (Irms)=12A, Shielding=Shielded, Termination=SMD/SMT, Tolerance=20%, Width=13.5mm
L2: library part CMP-1479-00029-1, "SMD Shielded Tiny Power Inductor WE-TPC, L=33.0 µH", Inductance="33.0 ÂµH", Manufacturer="Wuerth Elektronik", ComponentLink1Description="Manufacturer URL", ComponentLink1URL=http://www.we-online.com, ComponentLink2Description=Datasheet, ComponentLink2URL=http://www.we-online.de/katalog/media/pdf/744071330.pdf, PackageReference="WE-TPC 8043", PartNumber=744071330
LED1: library part CMP-1426-00014-1, "SMD mono-color Chip LED, WL-SMCW, Green", Color=Green, Manufacturer="Wuerth Elektronik", ComponentLink1Description="Manufacturer URL", ComponentLink1URL=http://www.we-online.com, ComponentLink2Description=Datasheet, ComponentLink2URL=http://katalog.we-online.com/led/datasheet/150120GS75000.pdf, PackageReference=1206_A, PartNumber=150120GS75000
Q2: library part CMP-2000-06981-1, "Silicon N Channel Power MOSFET Power Switching, 60 V, 25 A, 14 Ohm, 5-Pin LFPAK, RoHS, Tape and Reel", Current - Continuous Drain (Id) @ 25°C=25A(Ta), Drain to Source Voltage (Vdss)=60V, Input Capacitance (Ciss) @ Vds=2030pF@10V, Manufacturer=Renesas, Package / Case=SC-100,SOT-669, Package Description="5-Pin Surface Mount Device, Body 5.1 x 3.95 mm, Pitch 1.27 mm", Package Reference=LFPAK-5, Power - Max=45W, Standard Package=2,500, Supplier Device Package=LFPAK, Category=DiscreteSemiconductorProducts, Datasheet URL=https://www.renesas.com/en-us/doc/products/transistor/001/r07ds0076ej0200_rjk0651dpb.pdf, Datasheet Version="Rev. 2.00, 04/2013", Family=FETs-Single, FET Feature=LogicLevelGate,4.5VDrive, FET Type=MOSFETN-Channel,MetalOxide, Gate Charge (Qg) @ Vgs=15nC@4.5V, Manufacturer URL=https://www.renesas.com/, Mounting Technology=SurfaceMount, Mounting Type=SurfaceMount, Online Catalog=N-ChannelLogicLevelGateFETs, Other Names=RJK0651DPB-00#J5-NDRJK0651DPB-00#J5TR, Packaging=Tape&Reel(TR), PCN Assembly/Origin=PowerTransistorsRelocation12/Nov/2013, Rds On (Max) @ Id, Vgs=14mOhm@12.5A,10V, Series=-, Vgs(th) (Max) @ Id=-
Q3: library part CMP-1693-00003-4, "TRANS NPN 40V 0.6A SMD SOT23-3", Case/Package=SOT-23, Collector Base Voltage (VCBO)=75V, Collector Emitter Breakdown Voltage=40V, Collector Emitter Saturation Voltage=1V, Continuous Collector Current=600mA, Current=1A, Emitter Base Voltage (VEBO)=6V, Frequency=300MHz, Max Operating Temperature=150°C, Max Power Dissipation=300mW, Min Operating Temperature=-55°C, Package Quantity=3000, Power Dissipation=350mW, Collector Emitter Voltage (VCEO)=40V, Contact Plating=Tin, Current Rating=600mA, Element Configuration=Single, Gain Bandwidth Product=300MHz, Height=1mm, hFE Min=100, Lead Free="Lead Free", Length=3.05mm, Max Breakdown Voltage=40V, Max Collector Current=600mA, Max Frequency=300MHz, Mount="Surface Mount", Number of Elements=1, Number of Pins=3, Packaging="Tape and Reel", Polarity=NPN, Radiation Hardening=No, REACH SVHC="No SVHC", Termination=SMD/SMT, Transition Frequency=300MHz, Voltage=40V, Voltage Rating (DC)=40V, Weight=0.000282oz, Width=1.4mm
Q4 Q4 Q4: library part CMP-1058-00767-1, "Power MOSFET, 200 mA, 50 V, N-Channel, 3-Pin SOT-23, Pb-Free, Tape and Reel", Manufacturer="On Semiconductor", Package Type=SOT-23-3, Channel Polarity="N Channel", Ciss Typ (pF)=40, ComponentLink1Description="Manufacturer URL", ComponentLink1URL=http://www.onsemi.com/, ComponentLink2Description=Datasheet, ComponentLink2URL=http://www.onsemi.com/pub_link/Collateral/BSS138LT1-D.PDF, ComponentLink3Description="Package Specification", ComponentLink3URL=http://www.onsemi.cn/pub_link/Collateral/318-08.PDF, Configuration=Single, Coss Typ (pF)=12, Crss Typ (pF)=3.5, DatasheetVersion="Rev. 8", ID Max (A)=0.2, Mounting Technology="Surface Mount", PackageDescription="3-Pin Small Outline Transistor, Body 2.92 x 1.3 mm, Pitch 0.95 mm", PackageReference=SOT-23-3-318-08, PackageVersion="Rev. AP, 11/2009", Packing="Tape and Reel", PartNumber=BSS138LT1G, PD Max (W)=0.225, RoHS=Pb-Free, V(BR)DSS Min (V)=50, VGS Max (V)=20, VGS(th) Max (V)=1.5
R1: library part CMP-02407-004217-1, "RES Thick Film, 150kΩ, 1%, 0.25W, 100ppm/°C, 1206", Case Code (Imperial)=1206, Case Code (Metric)=3216, Max Operating Temperature=155°C, Max Power Dissipation=250mW, Min Operating Temperature=-55°C, Package Quantity=10000, Resistance=150kR, Temperature Coefficient=100ppm/°C, Tolerance=1%, Voltage Rating=200V, Case/Package=1206, Composition="Thick Film", Depth=1.6mm, Features="Automotive AEC-Q200", Height=0.024inch, Lead Free="Lead Free", Length=3.2mm, Military Standard=Not, Number of Terminations=2, Packaging="Tape and Reel", Power Rating=250mW, Weight=0.000353oz, Width=0.063inch
R2: library part CMP-2003-02456-1, Manufacturer="Vishay Dale", Part Number=CRCW1206100RFKEB
R3: library part CMP-1014-00670-1, "27K 0.25W 1% 1206 (3216 Metric)  SMD", Case-EIA=1206, Case-Metric=3216, Power="0.25 W", Tolerance="1 %", Technology=SMT
R4: library part CMP-2003-00251-1, Manufacturer=Panasonic, Part Number=ERJ-8ENF2551V
R5: library part CMP-2003-00714-1, Manufacturer=Panasonic, Part Number=ERJ-P08J102V
R6: library part CMP-2003-00513-1, Manufacturer=Panasonic, Part Number=ERJ-8ENF8451V
R7: library part CMP-2003-00016-1, Manufacturer=Panasonic, Part Number=ERJ-8ENF1000V
R8: library part CMP-2001-04321-1, Manufacturer="Vishay Dale", Part Number=WSLP0805R0100FEA
R9: library part CMP-2003-01877-2, "RES Thick Film, 1.2kΩ, 5%, 0.25W, 200ppm/°C, 1206", Case Code (Imperial)=1206, Case Code (Metric)=3216, Max Operating Temperature=155°C, Max Power Dissipation=250mW, Min Operating Temperature=-55°C, Package Quantity=1, Resistance=1.2kR, Temperature Coefficient=200ppm/°C, Tolerance=5%, Voltage Rating=200V, Case/Package=1206, Composition="Thick Film", Contact Plating=Tin, Depth=1.6mm, Features="Automotive AEC-Q200", Height=0.024inch, Lead Free="Lead Free", Length=3.2mm, Military Standard=Not, Number of Terminations=2, Packaging="Tape and Reel", Power Rating=250mW, Radiation Hardening=No, Termination=SMD/SMT, Voltage Rating (DC)=200V, Weight=0.000353oz, Width=1.6mm
R10: library part CMP-2003-04913-2, "RES SMD 150 OHM 1% 1/4W 1206", Manufacturer=Yageo, Package=AC1206, Power Rating=0.25W, Resistance=150Ω, Temperature="-55°C to +155°C", Temperature Range High=+155°C, Temperature Range Low=-55°C, Tolerance=0.01, Voltage Rating=200V, Automotive=Yes, Automotive Grade="Grade 0", Category=Res, ComponentLink2Description=Datasheet, ComponentLink2URL=http://www.yageo.com/NewPortal/yageodocoutput?fileName=/pdf/R-Chip/PYu-AC_51_RoHS_L_6.pdf, Composition="Thick Film", Device Class L1="Passive Components", Device Class L2=Resistors, Device Class L3="Chip SMD Resistors", Digikey Description="RES SMD 150 OHM 1% 1/4W 1206", Footprint Url=http://www.yageo.com/exep/pages/download/literatures/PYu-R_Mount_10.pdf, Height=0.65mm, Ipc Land Pattern Name=RESC310160X55, Lead Free=Yes, Manufacturer Part Number=AC1206FR-07150RL, Mouser Description="Thick Film Resistors 150ohm 1% 1/4W AEC-Q200", Octopart=https://octopart.com/ac1206fr-07150rl-yageo-21711118, RoHS=TRUE, Series=AC
R11 R11 R11 R11: library part CMP-2003-04875-1, Manufacturer="Vishay Dale", Part Number=CRCW120620K0FKEAHP
R12: library part CMP-2003-04883-1, Manufacturer="Vishay Dale", Part Number=CRCW120610K0FKEAHP
R13 R13 R13 R13 R13: library part CMP-2003-04896-2, "RES SMD 4.7K OHM 1% 1/4W 1206", Manufacturer=Yageo, Package=AC1206, Power Rating=0.25W, Resistance=4.7KΩ, Temperature="-55°C to +155°C", Temperature Range High=+155°C, Temperature Range Low=-55°C, Tolerance=0.01, Voltage Rating=200V, Automotive=Yes, Automotive Grade="Grade 0", Category=Res, ComponentLink2Description=Datasheet, ComponentLink2URL=http://www.yageo.com/NewPortal/yageodocoutput?fileName=/pdf/R-Chip/PYu-AC_51_RoHS_L_6.pdf, Composition="Thick Film", Device Class L1="Passive Components", Device Class L2=Resistors, Device Class L3="Chip SMD Resistors", Digikey Description="RES SMD 4.7K OHM 1% 1/4W 1206", Footprint Url=http://www.yageo.com/exep/pages/download/literatures/PYu-R_Mount_10.pdf, Height=0.65mm, Ipc Land Pattern Name=RESC310160X55, Lead Free=Yes, Manufacturer Part Number=AC1206FR-074K7L, Mouser Description="Thick Film Resistors - SMD 1/4W 4.7K ohm 1% AEC-Q200", Octopart=https://octopart.com/ac1206fr-074k7l-yageo-25629454, RoHS=TRUE, Series=AC
R14: library part CMP-2003-04435-1, Manufacturer=Panasonic, Part Number=ERA8AEB202V
R15: library part CMP-2003-04643-1, Manufacturer="Vishay Dale", Part Number=TNPW12061K00BEEN
R16: library part CMP-07231-000013-1, "RES SMD 4.7 OHM 5% 20W D2PAK", Manufacturer="Bourns Inc.", Package=PWR263S-20, Power Rating=20W, Resistance=4.7Ω, Temperature="-55°C to +155°C", Temperature Coefficient=100ppm/°C, Temperature Range High=+155°C, Temperature Range Low=-55°C, Tolerance=5%, Voltage Rating=250V, Automotive=Yes, Automotive Grade="Grade 0", Category=Res, ComponentLink2Description=Datasheet, ComponentLink2URL=https://www.bourns.com/docs/Product-Datasheets/PWR263S-20.pdf, Composition="Thick Film", Device Class L1="Passive Components", Device Class L2=Resistors, Device Class L3="Chip SMD Resistors", Digikey Description="RES SMD 4.7 OHM 5% 20W D2PAK", Height=4.88mm, Lead Free=Yes, Manufacturer Part Number=PWR263S-20-4R70J, Mouser Description="Thick Film Resistors 4.7ohms 5% 20watts", Octopart=https://octopart.com/pwr263s-20-4r70j-bourns-10527647, RoHS=TRUE, Series=PWR263S-20
U2: library part CMP-0063-01299-4, "High Efficiency Low-Side N-Channel Controller for Switching Regulator, Automotive Grade 1, 8-pin MSOP, Pb-Free, 3500 Reel", Manufacturer="Texas Instruments", PackageTopMarking=ZXTT*SSFB, PowerWise=N, Code_JEDEC=MO-187-AA, ComponentLink1Description="Datasheet URL", ComponentLink1URL=http://www.ti.com/general/docs/lit/getliterature.tsp?genericPartNumber=LM3478Q-Q1&fileType=pdf, CompType=MiscPower, High-Reliability=Y, PackageDescription="MINI SOIC, .118 x .118 x .034in, 8 Lead, .0256in Pitch", PackageReference=DGK0008A, PartNumber=LM3478QMMX/NOPB, PinCount=8, RoHS=Y
U3: library part CMP-04918-000427-1, "IC REG BUCK 5V 500MA 8SOIC", Case/Package="SOIC N", Max Input Voltage=40V, Max Operating Temperature=125°C, Max Output Current=500mA, Min Input Voltage=8V, Min Operating Temperature=-40°C, Nominal Output Voltage=5V, Package Quantity=2500, Quiescent Current=2.5mA, Switching Frequency=260kHz, Contact Plating=Tin, Efficiency=90%, Lead Free="Lead Free", Mount="Surface Mount", Number of Outputs=1, Number of Pins=8, Operating Supply Voltage=40V, Output Current=500mA, Output Type=Fixed, Output Voltage=5V, Packaging="Tape and Reel", REACH SVHC="No SVHC", RoHS Compliant=Yes

## Free pads (board coordinates)
  round 1.524 hole 1.9 unplated mask+0: 50(107,58.127) 51(3,58.127) 52(26,89.127) 53(86,89.127)

## Nets (pads, with @x,y where several pads share a name; then routed paths per layer and width w, separated by ;. In a path a pad name is that pad's centre, name@x,y a point inside that pad or via, vN(x,y) a via of type N, cw(c..) or ccw(c..) an arc to the next point about the centre after c; other vN are vias at no path point)
5V: A1.4 A2.30 C9.1 D3.1 J1.1@6,5.127 J1.1@20,5.127 J1.1@34,5.127 K1.4 L2.2 R13.2@16,75.6 R13.2@26,75.6
12V: C8.1 D2.4 J1.1@6,32.127 J1.1@20,32.127 J1.1@34.127,32.254 R6.2 R16.2
BTRX: A2.5 R14.1 R15.2
BTTX: A1.2 A2.6
BUTTON1: A2.8 J1.2@11,5.127 R13.1@6.4,11.127
BUTTON2: A2.9 J1.2@25,5.127 R13.1@21.8,11.127
BUTTON3: A2.10 J1.2@39,5.127 R13.1@39.4,11.127
GND5: A1.3 A2.4 A2.29 F2.2 J2.A2 LED1.1 Q3.2 R12.2 R13.2@9.6,11.127 R13.2@25,11.127 R13.2@42.6,11.127 R14.2
GND12: F1.2 K1.2 Q4.2 R11.2@16.725,40.127 R11.2@33.275,40.127 R11.2@44,37.852
MOSFET1: A2.11 Q4.1@12,40.127 R11.1@44,40.402
MOSFET1NET: J1.2@11,32.127 Q4.3@11.05,38.127
MOSFET2: A2.12 Q4.1@25.95,40.127 R11.1@30.725,40.127
MOSFET2NET: J1.2@25,32.127 Q4.3@25,38.127
MOSFET3: A2.13 Q4.1@39.95,40.127 R11.1@19.275,40.127
MOSFET3NET: J1.2@39,32.127 Q4.3@39,38.127
NetA1_1: A1.1 R15.1
NetA2_14: A2.14 R11.2@39.352,48.752 R12.1
NetA2_15: A2.15 R10.2
NetA2_23: A2.23 J2.A3 R13.1@26,72.4
NetA2_24: A2.24 J2.A1 R13.1@16,72.4
NetC1_1: C1.1 C2.1 C3.1 C6.2 C9.2 D1.2 F2.1 J1.2@105.627,4.804 L1.1 U1.1 U2.8 U3.6
NetC1_2: C1.2 J1.1@100.627,4.804 Q1.2 R1.1 U1.5
NetC2_2: C2.2 C3.2 C4.2 C6.1 C7.2 C8.2 F1.1 Q1.3 R3.2 R4.1 R5.1 R8.1 U2.4 U2.5 U3.7
NetC4_1: C4.1 C5.2 U2.2
NetC5_1: C5.1 R4.2
NetC7_1: C7.1 R7.1 U2.1
NetC10_1: C10.1 U3.1
NetC10_2: C10.2 D1.1 L2.1 U3.8
NetD2_3: D2.3 L1.2 Q2.5
NetD3_2: D3.2 K1.1 Q3.3
NetJ1_1: J1.1@48,5.127 R16.1
NetJ1_2: J1.2@53,5.127 K1.3 R11.1@39.352,46.202
NetLED1_2: LED1.2 R10.1
NetQ1_1: Q1.1 R2.2
NetQ2_1: Q2.1 Q2.2 Q2.3 R7.2 R8.2
NetQ2_4: Q2.4 U2.6
NetQ3_1: Q3.1 R9.2
NetR1_2: R1.2 R2.1 U1.3
NetR3_1: R3.1 U2.7
NetR5_2: R5.2 R6.1 U2.3
RELAY: A2.7 R9.1
pads on no net: A2.1 A2.2 A2.3 A2.16 A2.17 A2.18 A2.19 A2.20 A2.21 A2.22 A2.25 A2.26 A2.27 A2.28 D2.1 L2.3 L2.4 R16.3 U1.2 U1.4 U1.6 U3.2 U3.3 U3.4 U3.5

## Polygon pours and split planes (outlines as drawn)
5V on Top Layer "5V_L01_P001" (solid, pour order 1): 1,55.127 1,79.127 5.127,83.254 21,83.254 21,89.127 25,93.127 87,93.127 91,89.127 91,83.254 104.873,83.254 109,79.127 109,55.127
12V on Top Layer "12V_L01_P000" (solid, pour order 0): 1,1.127 57.127,1.127 57.127,54.254 1,54.254
GND12 on Bottom Layer "GND12_L02_P005" (solid, pour order 5): 1,1.127 57,1.127 57,54.127 1,54.127
GND5 on Bottom Layer "GND5_L02_P004" (solid, pour order 4): 1,55.127 1,79.127 5,83.127 21,83.127 21,89.127 25,93.127 87,93.127 91,89.127 91,83.127 105,83.127 109,79.127 109,55.127

## Silkscreen, mask and mechanical layers (free items; w line width, h text height)
Top Overlay:
  drawing of 29 lines, arcs and shapes, not listed
  text "5V" at 6.381,79.508 h1.52
  text "12V Management" at 59.381,51.016 h1.52
  text "5V Management" at 89.381,51.016 h1.52
  text "12V" at 2.381,50.508 h1.52
Bottom Overlay:
  drawing of 24 lines, arcs and shapes, not listed
Outline:
  lines w0.254: 92.127,84.254 92.127,89.254 ; 92.127,84.254 92.127,84.254 ; 92.127,84.254 105.127,84.254 110.127,79.254 110.127,0.127 0.127,0.127 0.127,79.254 5.127,84.254 20.127,84.254 20.127,89.254 25.127,94.254 87.127,94.254 92.127,89.254 ; 92.127,89.254 92.127,89.254
Top Courtyard:
  circle w0.254: c26,89.127 r2
  circle w0.254: c86,89.127 r2
  circle w0.254: c3,58.127 r2
  circle w0.254: c107,58.127 r2

## Text inside footprints (layer, text, board x,y; h text height)
A1: Top Overlay "HM-10 / BLE Module" at 103.192,66.603 h1.52 r180
A2: Top Overlay "Arduino Nano" at 40.033,64.254 h1.52
J2: Top Overlay "A1" at 10.975,62.4 h1.5